# EAGLE board PCB (EAGLE 9.7.0)
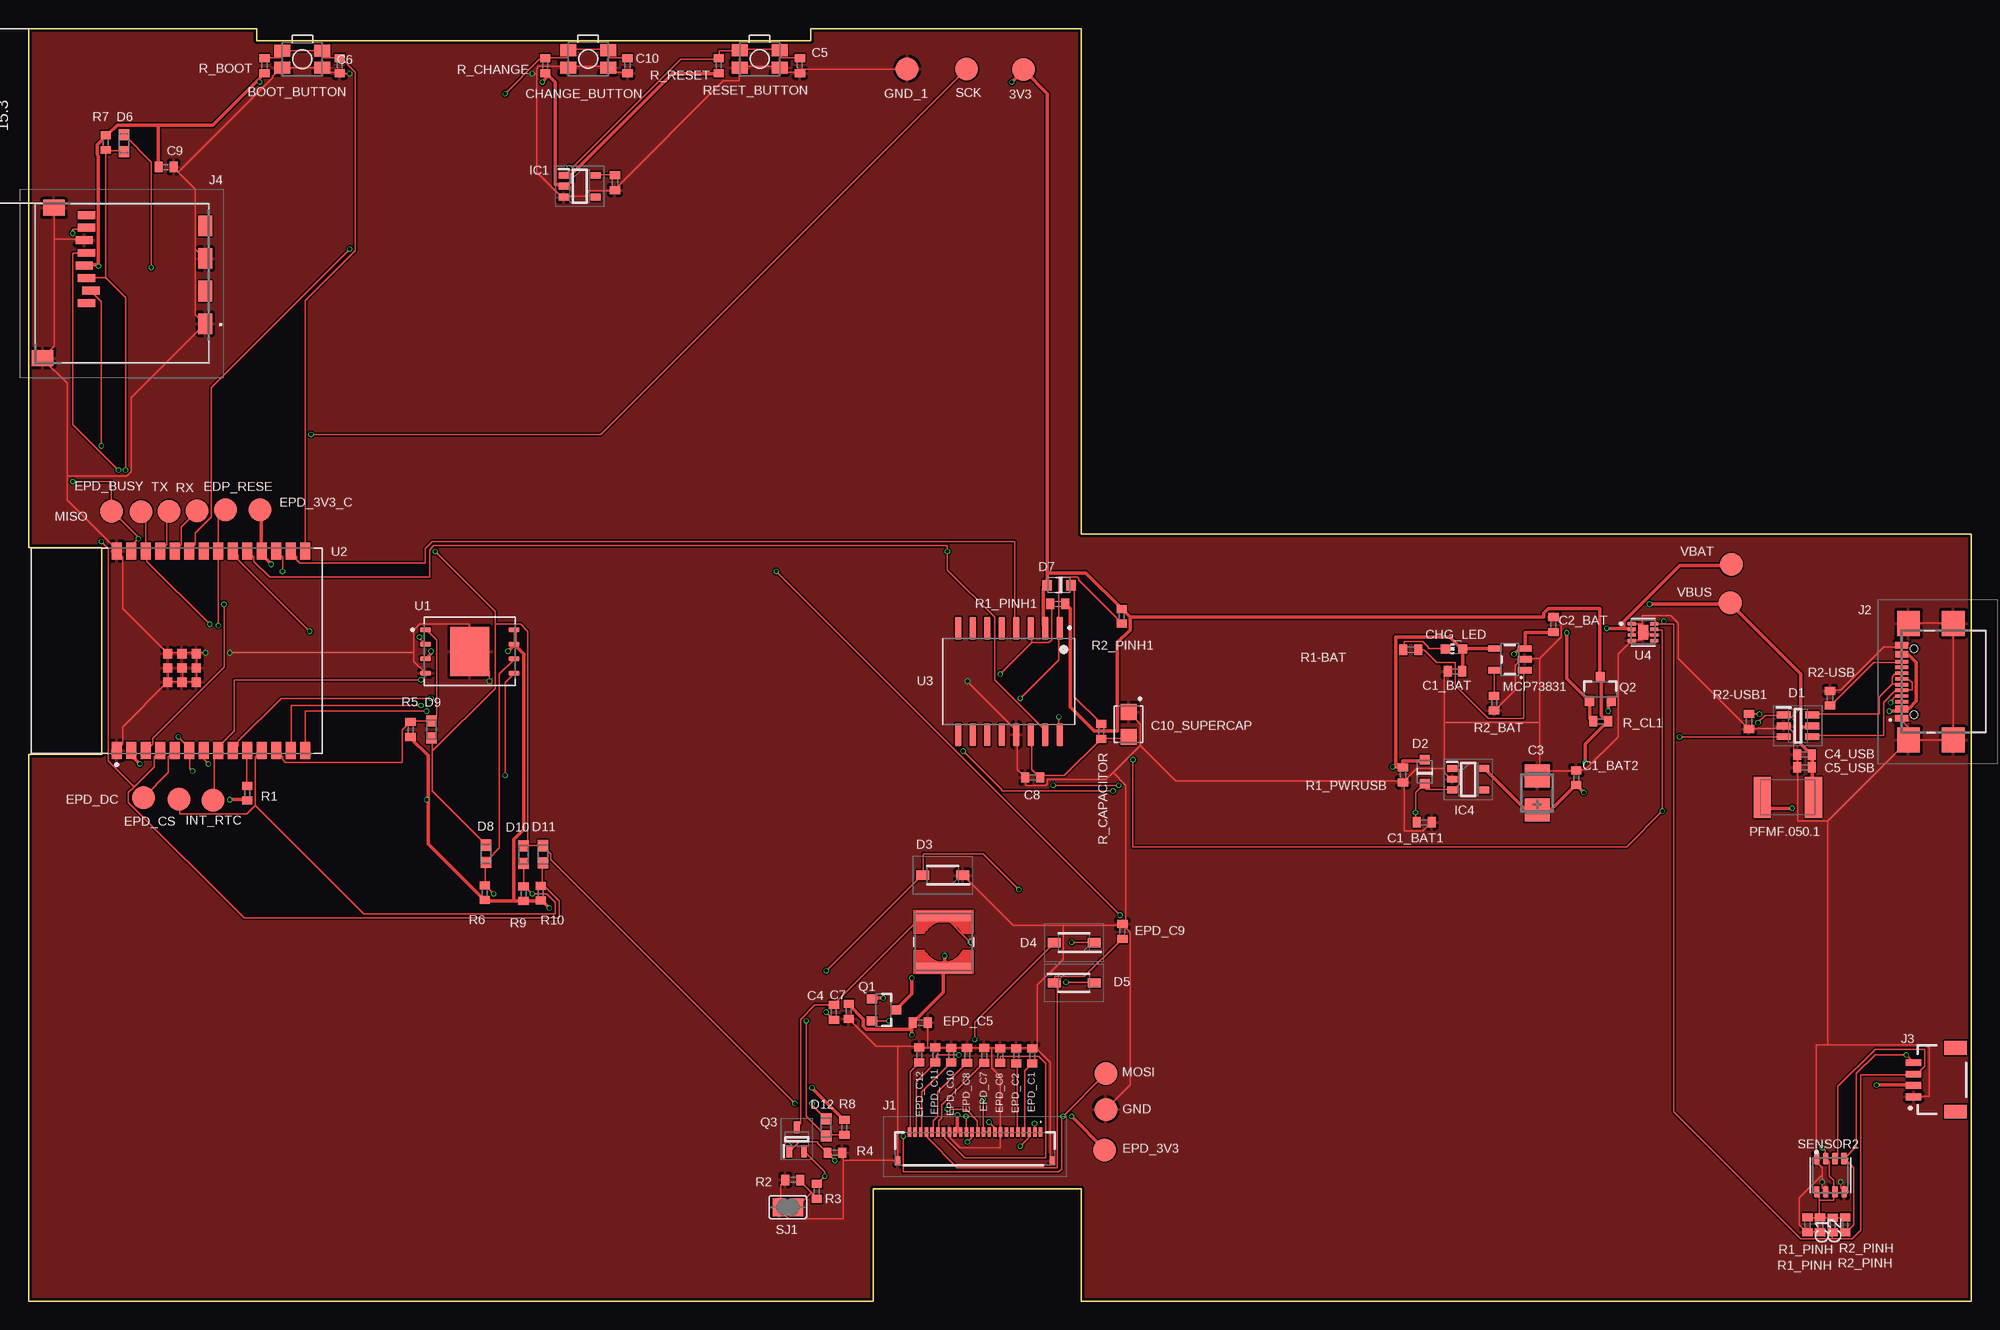
[diagram p0: board, top side]
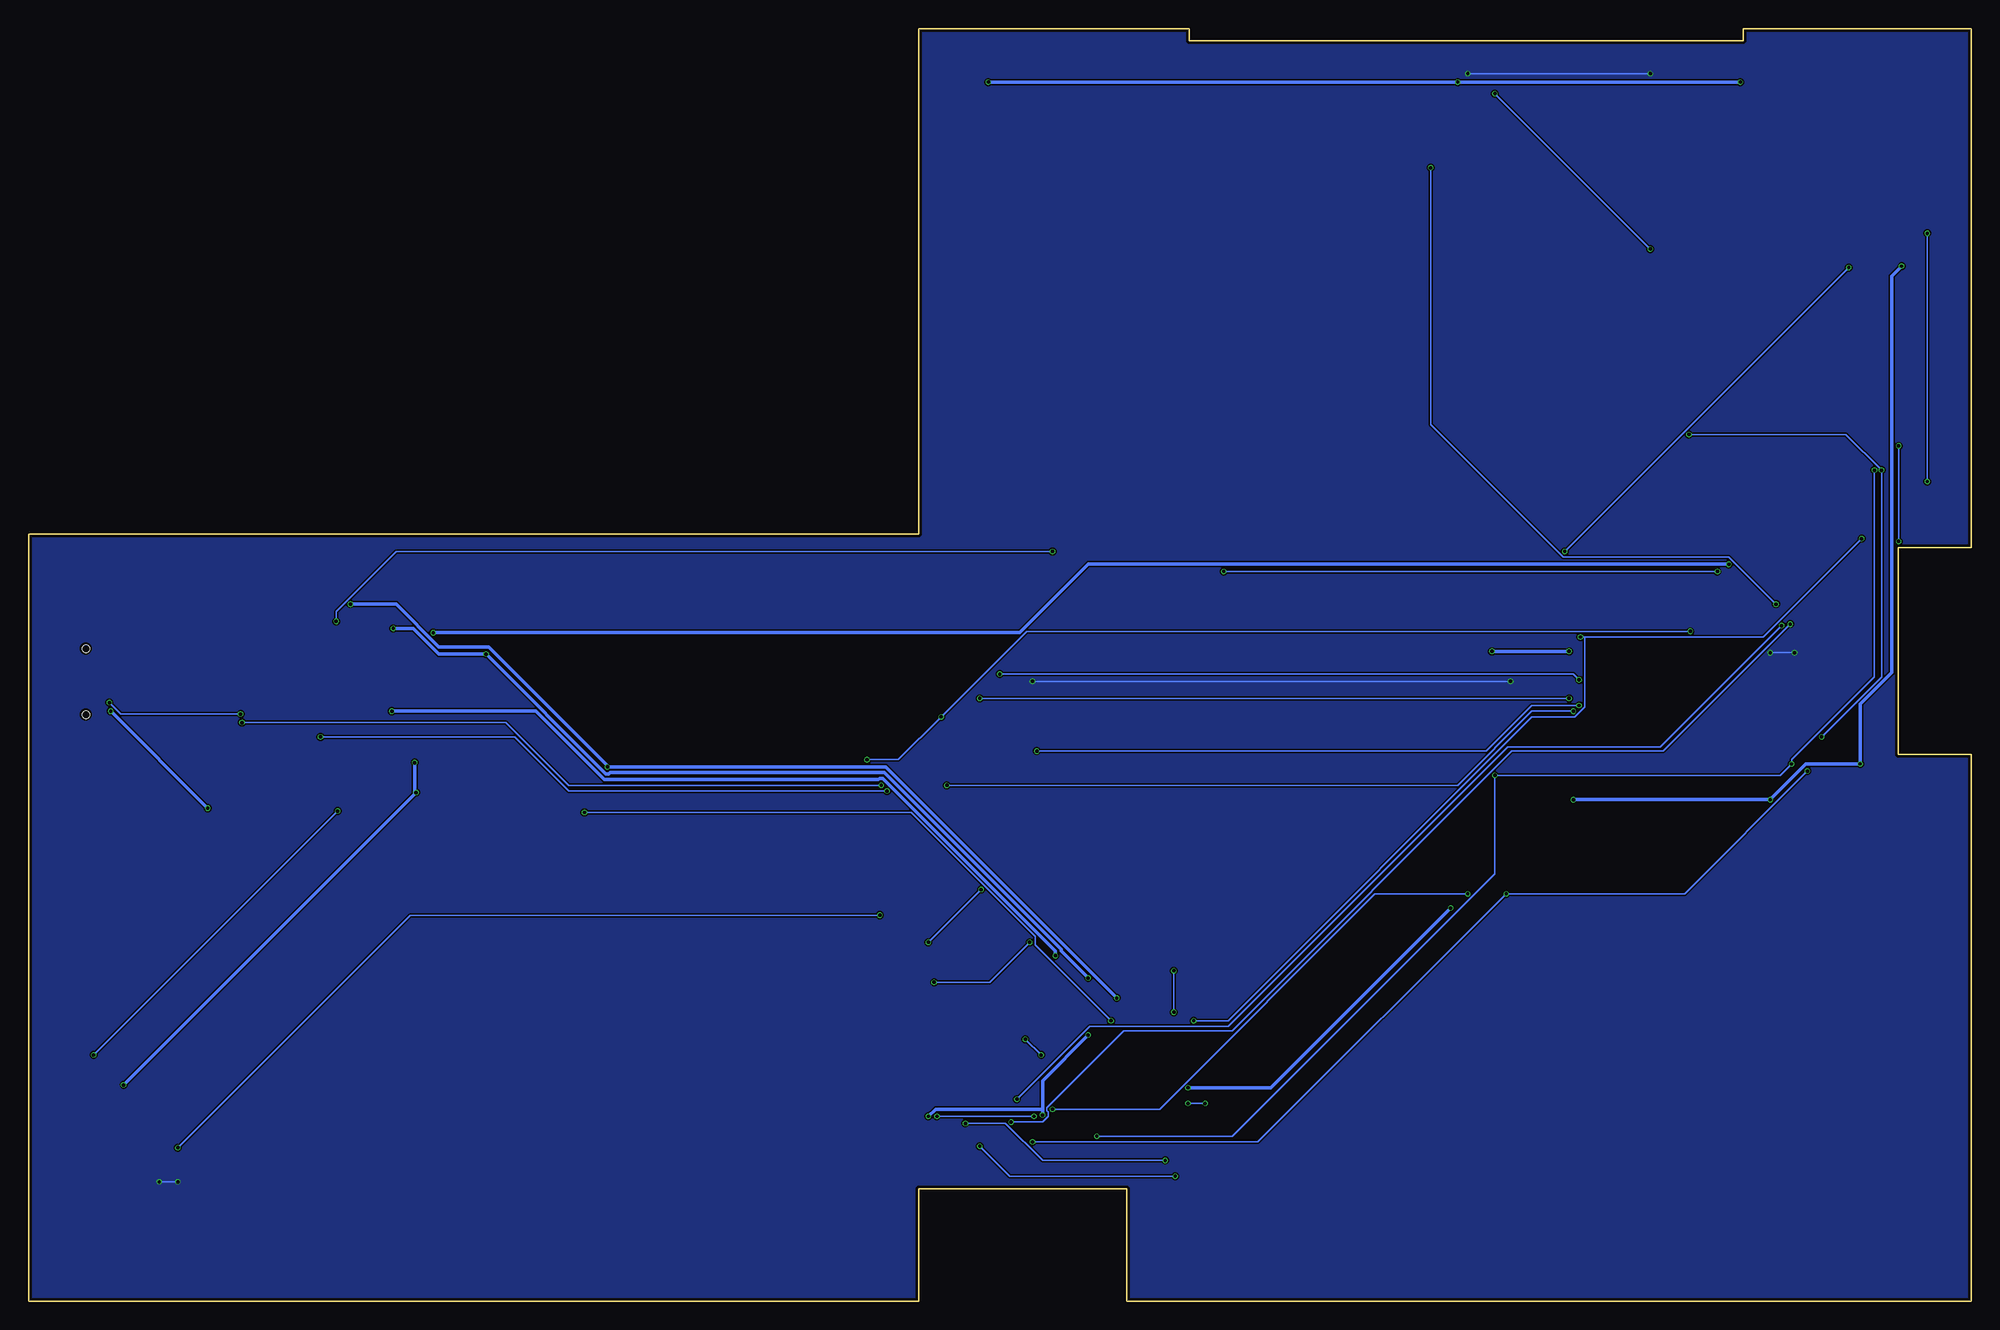
[diagram p1: board, bottom side, seen from below]

Size 170.2 x 111.52 mm. Coordinates in mm from the lower left corner, seen from the top.
Outline: 20,110.46 68.5,110.46 68.5,111.52 92.2,111.52 92.2,67.2 170.2,67.2 170.2,0 92.2,0 92.2,9.82 74,9.82 74,0 0,0 0,47.92 6.4,47.92 6.4,66.02 0,66.02 0,111.52 20,111.52 20,110.46
Copper layers (1*16): Top 0.035mm / dielectric 1.6mm / Bottom 0.035mm
Design rules "jlcpcb-2layers.dru *": minimum track width 0.15mm, minimum drill 0.3mm, track to track 5mil, track to pad 5mil, pad to pad 5mil, via to via 5mil, smd to smd 5mil, copper to edge 0.2mm, drill to drill 6mil, minimum pad ring 10mil, minimum via ring 3mil, stop-mask expansion 4mil, vias tented up to drill 0mil, thermal gap 10mil
Net classes: 1 power: width 0.3 mm

## Footprints (pad centres in the part's own frame; a part is rotated, then mirrored left to right if it is on the bottom)
TP20R = smd 2 x 2: TP 0,0
MYBUTTON = smd 1.4 x 1.05: 1 1.75,0.75; 2 -1.75,0.75; 3 -1.75,-0.75; 4 1.75,-0.75
ESP32_WROVER_EAGLE-LTSPICE_C0402 = smd 0.7 x 0.9: 1 -0.65,0; 2 0.65,0
RCL_CT3528 = smd 2 x 2.2: + -1.5,0; - 1.5,0
CAPCP3225X100N = smd 1.4 x 1.4: 1 -1.1,0; 2 1.1,0
ADAFRUIT_CHIP-LED0603 = smd 0.8 x 0.8: A 0,-0.75; C 0,0.75
SOT95P280X145-6N = smd 1.2 x 0.6: 1 -1.25,0.95; 2 -1.25,0; 3 -1.25,-0.95; 4 1.25,-0.95; 5 1.25,0; 6 1.25,0.95
ESP32_WROVER_AVX---SD0805S020S1R0_AVX_SD0805S020S1R0_0 = smd 0.8 x 0.9: 1 -1.05,0; 2 1.05,0
SOD3716X135N = smd 1.15 x 0.8: 1 -1.75,0; 2 1.75,0
DIOC1608X36N = smd 0.97 x 0.94: 1 -0.75,0; 2 0.75,0
SOT95P280X120-5N = smd 0.9 x 0.6: 1 -1.4,0.95; 2 -1.4,0; 3 -1.4,-0.95; 4 1.4,-0.95; 5 1.4,0.95
FH34SRJ24S05SH99 = smd 0.3 x 0.8: 1 5.75,1.45; 2 5.25,1.45; 3 4.75,1.45; 4 4.25,1.45; 5 3.75,1.45; 6 3.25,1.45; 7 2.75,1.45; 8 2.25,1.45; 9 1.75,1.45; 10 1.25,1.45; 11 0.75,1.45; 12 0.25,1.45; 13 -0.25,1.45; 14 -0.75,1.45; 15 -1.25,1.45; 16 -1.75,1.45; 17 -2.25,1.45; 18 -2.75,1.45; 19 -3.25,1.45; 20 -3.75,1.45; 21 -4.25,1.45; 22 -4.75,1.45; 23 -5.25,1.45; 24 -5.75,1.45 | smd 0.4 x 0.8: MP1 6.75,-1.05; MP2 -6.75,-1.05
SAMACSYS_PARTS_USB4110GFA = smd 0.3 x 1.15: A1 -3.35,3.678; A4 -2.55,3.678; A5 -1.25,3.678; A6 -0.25,3.678; A7 0.25,3.678; A8 1.25,3.678; A9 2.55,3.678; A12 3.35,3.678; B1 3.05,3.678; B4 2.25,3.678; B5 1.75,3.678; B6 0.75,3.678; B7 -0.75,3.678; B8 -1.75,3.678; B9 -2.25,3.678; B12 -3.05,3.678 | smd 2.18 x 2: MP1 -5.11,-0.827; MP2 5.11,-0.827; MP3 -5.11,3.103; MP4 5.11,3.103 | hole 0.65: -2.89,2.603; 2.89,2.603
JST04_1MM_RA = smd 0.6 x 1.35: 1 -1.5,0; 2 -0.5,0; 3 0.5,0; 4 1.5,0 | smd 1.2 x 2: NC1 2.8,-3.675; NC2 -2.8,-3.675
112ATAARR03ATTEND = smd 1.8 x 1.2: G1 10.6,10.4; G2 4.9,10.4; S1 7.75,10.4; S2 2.05,10.4 | smd 1.4 x 1.9: G3 13.6,-3.85; G4 0.45,-2.85 | smd 0.7 x 1.5: P1 8.8,0; P2 7.7,0.4; P3 6.6,0; P4 5.5,-0.2; P5 4.4,0; P6 3.3,-0.2; P7 2.2,0; P8 1.1,0
IND_4828-WE-TPC_WRE = smd 0.889 x 4.826: 1 -2.286,0; 2 2.286,0
ESP32_WROVER_SPARKFUN-IC-POWER_SOT23-5 = smd 0.55 x 1.2: 1 -0.95,-1.3; 2 0,-1.3; 3 0.95,-1.3; 4 0.95,1.3; 5 -0.95,1.3
ESP32C6_VARISTOR_CT/CN1812 = smd 1.5 x 3.6: 1 -2.25,0; 2 2.25,0
ESP32_WROVER_SPARKFUN-DISCRETESEMI_SOT23-3 = smd 0.8 x 0.9: 1 -0.95,-1; 2 0.95,-1; 3 0,1.1
SOT65P210X110-3N = smd 1.05 x 0.5: 1 -1.05,0.65; 2 -1.05,-0.65; 3 1.05,0
ESP32_WROVER_EAGLE-LTSPICE_R0402 = smd 0.7 x 0.9: 1 -0.65,0; 2 0.65,0
ESP32_WROVER_BME680_PSON80P300X300X100-8N = smd 1.016 x 0.5: 1 1.458,1.2; 2 1.458,0.4; 3 1.458,-0.4; 4 1.458,-1.2; 5 -1.458,-1.22; 6 -1.458,-0.4; 7 -1.458,0.4; 8 -1.458,1.2
SJ = smd 1.168 x 1.6: 1 -0.762,0; 2 0.762,0
SON127P600X800X80-9N = smd 0.94 x 0.44: 1 -3.895,1.905; 2 -3.895,0.635; 3 -3.895,-0.635; 4 -3.895,-1.905; 5 3.895,-1.905; 6 3.895,-0.635; 7 3.895,0.635; 8 3.895,1.905 | smd 3.4 x 4.3: 9 0,0
XCVR_ESP32-C6-WROOM-1-N8 = smd 1.5 x 0.9: 1 -8.75,5.26; 2 -8.75,3.99; 3 -8.75,2.72; 4 -8.75,1.45; 5 -8.75,0.18; 6 -8.75,-1.09; 7 -8.75,-2.36; 8 -8.75,-3.63; 9 -8.75,-4.9; 10 -8.75,-6.17; 11 -8.75,-7.44; 12 -8.75,-8.71; 13 -8.75,-9.98; 14 -8.75,-11.25; 15 8.75,-11.25; 16 8.75,-9.98; 17 8.75,-8.71; 18 8.75,-7.44; 19 8.75,-6.17; 20 8.75,-4.9; 21 8.75,-3.63; 22 8.75,-2.36; 23 8.75,-1.09; 24 8.75,0.18; 25 8.75,1.45; 26 8.75,2.72; 27 8.75,3.99; 28 8.75,5.26 | smd 0.8 x 0.8: 29_1 -2.755,0.79; 29_2 -1.505,0.79; 29_3 -0.255,0.79; 29_4 -2.755,-0.46; 29_5 -1.505,-0.46; 29_6 -0.255,-0.46; 29_7 -2.755,-1.71; 29_8 -1.505,-1.71; 29_9 -0.255,-1.71
SOIC127P1032X265-16N = smd 2.05 x 0.59: 1 -4.655,4.445; 2 -4.655,3.175; 3 -4.655,1.905; 4 -4.655,0.635; 5 -4.655,-0.635; 6 -4.655,-1.905; 7 -4.655,-3.175; 8 -4.655,-4.445; 9 4.655,-4.445; 10 4.655,-3.175; 11 4.655,-1.905; 12 4.655,-0.635; 13 4.655,0.635; 14 4.655,1.905; 15 4.655,3.175; 16 4.655,4.445
SON50P200X200X80-9N = smd 0.76 x 0.27: 1 -0.985,0.75; 2 -0.985,0.25; 3 -0.985,-0.25; 4 -0.985,-0.75; 5 0.985,-0.75; 6 0.985,-0.25; 7 0.985,0.25; 8 0.985,0.75 | smd 0.9 x 1.3: 9 0,0

## Placement (x,y rotation side)
3V3  TPTP20R  [TP20R]  87.17,107.92 0 top
BOOT_BUTTON  BUTTON_CUSYOMV1  [MYBUTTON]  23.99,108.82 180 top
C1  100nF  [ESP32_WROVER_EAGLE-LTSPICE_C0402]  155.84,6.68 270 top
C1_BAT  4.7uF  [ESP32_WROVER_EAGLE-LTSPICE_C0402]  124.96,55.19 180 top
C1_BAT1  4.7uF  [ESP32_WROVER_EAGLE-LTSPICE_C0402]  122.27,41.96 0 top
C1_BAT2  4.7uF  [ESP32_WROVER_EAGLE-LTSPICE_C0402]  135.57,45.87 90 top
C2  100nF  [ESP32_WROVER_EAGLE-LTSPICE_C0402]  156.94,6.69 270 top
C2_BAT  4.7UF  [ESP32_WROVER_EAGLE-LTSPICE_C0402]  133.58,59.3 90 top
C3  100uF  [RCL_CT3528]  132.15,44.53 90 top
C4  4.7uF/25V  [ESP32_WROVER_EAGLE-LTSPICE_C0402]  70.55,25.31 90 top
C4_USB  100nF  [ESP32_WROVER_EAGLE-LTSPICE_C0402]  155.57,47.89 180 top
C5  1uF  [ESP32_WROVER_EAGLE-LTSPICE_C0402]  67.57,108.27 270 top
C5_USB  4.7uF  [ESP32_WROVER_EAGLE-LTSPICE_C0402]  155.57,46.78 180 top
C6  100nF  [ESP32_WROVER_EAGLE-LTSPICE_C0402]  27.27,108.27 270 top
C7  10uF  [ESP32_WROVER_EAGLE-LTSPICE_C0402]  71.85,25.4 270 top
C8  100nF  [ESP32_WROVER_EAGLE-LTSPICE_C0402]  87.97,45.89 180 top
C9  100nF  [ESP32_WROVER_EAGLE-LTSPICE_C0402]  12.05,99.38 0 top
C10  100nF  [ESP32_WROVER_EAGLE-LTSPICE_C0402]  52.47,108.27 270 top
C10_SUPERCAP  CPH3225A  [CAPCP3225X100N]  96.37,50.54 270 top
C_DELAY  100nF  [ESP32_WROVER_EAGLE-LTSPICE_C0402]  51.37,98.02 270 top
CHANGE_BUTTON  BUTTON_CUSYOMV1  [MYBUTTON]  49.02,108.85 180 top
CHG_LED  [ADAFRUIT_CHIP-LED0603]  124.88,57.16 90 top
D1  USBLC6-2SC6Y  [SOT95P280X145-6N]  155,50.41 0 top
D2  ESP32_WROVER_AVX---SD0805S020S1R0_AVX_SD0805S020S1R0_0_0AVX_SD0805S020S1R0_0_0  [ESP32_WROVER_AVX---SD0805S020S1R0_AVX_SD0805S020S1R0_0]  122.31,46.39 90 top
D3  MBR0530  [SOD3716X135N]  80.09,37.32 180 top
D4  MBR0530  [SOD3716X135N]  91.59,31.41 180 top
D5  MBR0530  [SOD3716X135N]  91.59,27.89 0 top
D6  PGB1010603MR  [DIOC1608X36N]  8.37,101.48 90 top
D7  ESP32_WROVER_AVX---SD0805S020S1R0_AVX_SD0805S020S1R0_0_0AVX_SD0805S020S1R0_0_0  [ESP32_WROVER_AVX---SD0805S020S1R0_AVX_SD0805S020S1R0_0]  90.27,62.74 180 top
D8  PGB1010603MR  [DIOC1608X36N]  40.07,39.2 90 top
D9  PGB1010603MR  [DIOC1608X36N]  35.31,50.09 270 top
D10  PGB1010603MR  [DIOC1608X36N]  43.37,39.12 90 top
D11  PGB1010603MR  [DIOC1608X36N]  45.07,39.16 90 top
D12  PGB1010603MR  [DIOC1608X36N]  69.87,15.23 90 top
EDP_RESE  TPTP20R  [TP20R]  17.27,69.34 0 top
EPD_3V3  TPTP20R  [TP20R]  94.27,13.24 0 top
EPD_3V3_C  TPTP20R  [TP20R]  20.27,69.36 0 top
EPD_BUSY  TPTP20R  [TP20R]  9.87,69.18 0 top
EPD_C1  1uF/50V  [ESP32_WROVER_EAGLE-LTSPICE_C0402]  87.92,21.49 90 top
EPD_C2  1uF/50V  [ESP32_WROVER_EAGLE-LTSPICE_C0402]  86.52,21.5 90 top
EPD_C5  1uF/50V  [ESP32_WROVER_EAGLE-LTSPICE_C0402]  78.12,24.41 0 top
EPD_C6  1uF/50V  [ESP32_WROVER_EAGLE-LTSPICE_C0402]  85.12,21.52 90 top
EPD_C7  1uF/50V  [ESP32_WROVER_EAGLE-LTSPICE_C0402]  83.72,21.53 90 top
EPD_C8  1uF/50V  [ESP32_WROVER_EAGLE-LTSPICE_C0402]  82.22,21.54 90 top
EPD_C9  1uF/50V  [ESP32_WROVER_EAGLE-LTSPICE_C0402]  95.82,32.41 90 top
EPD_C10  1uF/50V  [ESP32_WROVER_EAGLE-LTSPICE_C0402]  80.82,21.56 90 top
EPD_C11  1uF/50V  [ESP32_WROVER_EAGLE-LTSPICE_C0402]  79.42,21.57 90 top
EPD_C12  1uF/50V  [ESP32_WROVER_EAGLE-LTSPICE_C0402]  78.02,21.58 90 top
EPD_CS  TPTP20R  [TP20R]  13.17,44 0 top
EPD_DC  TPTP20R  [TP20R]  10.07,44.12 0 top
GND  TPTP20R  [TP20R]  94.37,16.8 0 top
GND_1  TPTP20R  [TP20R]  76.97,107.98 0 top
IC1  BD5229G-TR  [SOT95P280X120-5N]  48.28,97.7 0 top
IC4  XC6220A331MR-G  [SOT95P280X120-5N]  126.12,45.73 0 top
INT_RTC  TPTP20R  [TP20R]  16.17,43.9 0 top
J1  FH34SRJ-24S-0.5SH_99_  [FH34SRJ24S05SH99]  82.91,13.36 0 top
J2  SAMACSYS_PARTS_USB4110-GF-A  [SAMACSYS_PARTS_USB4110GFA]  167.78,54.28 90 top
J3  QWIIC_RIGHT_ANGLE  [JST04_1MM_RA]  165.13,19.4 90 top
J4  112A-TAAR-R03_ATTEND  [112ATAARR03ATTEND]  5.08,96.26 270 top
L1  68uH  [IND_4828-WE-TPC_WRE]  80.16,31.48 270 top
MCP73831  ESP32_WROVER_SPARKFUN-IC-POWER_MCP73831  [ESP32_WROVER_SPARKFUN-IC-POWER_SOT23-5]  129.76,56.24 90 top
MISO  TPTP20R  [TP20R]  7.27,69.22 0 top
MOSI  TPTP20R  [TP20R]  94.37,19.94 0 top
PFMF.050.1  ESP32C6_VARISTORCN1812  [ESP32C6_VARISTOR_CT/CN1812]  154.11,44.15 0 top
Q1  20V/4.2A/52mΩ/1.4W  [ESP32_WROVER_SPARKFUN-DISCRETESEMI_SOT23-3]  74.88,25.52 270 top
Q2  20V/4.2A/52mΩ/1.4W  [ESP32_WROVER_SPARKFUN-DISCRETESEMI_SOT23-3]  137.69,53.6 0 top
Q3  SI1308EDL-T1-GE3  [SOT65P210X110-3N]  67.29,14.19 90 top
R1  10k  [ESP32_WROVER_EAGLE-LTSPICE_R0402]  19.16,44.51 270 top
R1-BAT  200  [ESP32_WROVER_EAGLE-LTSPICE_R0402]  121.08,57.08 0 top
R1_PINH  10K  [ESP32_WROVER_EAGLE-LTSPICE_R0402]  158.04,6.67 90 top
R1_PINH1  10K  [ESP32_WROVER_EAGLE-LTSPICE_R0402]  90.17,61.1 0 top
R1_PWRUSB  100K  [ESP32_WROVER_EAGLE-LTSPICE_R0402]  120.4,46.12 90 top
R2  2.2  [ESP32_WROVER_EAGLE-LTSPICE_R0402]  66.95,10.62 0 top
R2-USB  5K1  [ESP32_WROVER_EAGLE-LTSPICE_R0402]  157.81,52.83 90 top
R2-USB1  5K1  [ESP32_WROVER_EAGLE-LTSPICE_R0402]  150.71,50.79 90 top
R2_BAT  2K  [ESP32_WROVER_EAGLE-LTSPICE_R0402]  128.38,52.39 90 top
R2_PINH  10K  [ESP32_WROVER_EAGLE-LTSPICE_R0402]  159.14,6.68 90 top
R2_PINH1  10K  [ESP32_WROVER_EAGLE-LTSPICE_R0402]  95.77,60.01 90 top
R3  0.47  [ESP32_WROVER_EAGLE-LTSPICE_R0402]  69.04,9.61 90 top
R4  10k  [ESP32_WROVER_EAGLE-LTSPICE_R0402]  70.64,13 180.1 top
R5  10K  [ESP32_WROVER_EAGLE-LTSPICE_R0402]  33.47,50.08 270 top
R6  10K  [ESP32_WROVER_EAGLE-LTSPICE_R0402]  39.97,35.79 270 top
R7  10K  [ESP32_WROVER_EAGLE-LTSPICE_R0402]  6.77,101.53 90 top
R8  10K  [ESP32_WROVER_EAGLE-LTSPICE_R0402]  71.47,15.22 90 top
R9  10K  [ESP32_WROVER_EAGLE-LTSPICE_R0402]  43.37,35.71 270 top
R10  10K  [ESP32_WROVER_EAGLE-LTSPICE_R0402]  44.87,35.75 270 top
R_BOOT  10K  [ESP32_WROVER_EAGLE-LTSPICE_R0402]  20.67,108.27 90 top
R_CAPACITOR  15  [ESP32_WROVER_EAGLE-LTSPICE_R0402]  93.97,49.93 270 top
R_CHANGE  10K  [ESP32_WROVER_EAGLE-LTSPICE_R0402]  45.27,108.27 90 top
R_CL1  10K  [ESP32_WROVER_EAGLE-LTSPICE_R0402]  137.72,50.81 180 top
R_RESET  10K  [ESP32_WROVER_EAGLE-LTSPICE_R0402]  60.47,108.27 90 top
RESET_BUTTON  BUTTON_CUSYOMV1  [MYBUTTON]  64.04,108.85 180 top
RX  TPTP20R  [TP20R]  14.77,69.24 0 top
SCK  TPTP20R  [TP20R]  82.17,107.96 0 top
SENSOR2  ESP32_WROVER_BME680_BME680  [ESP32_WROVER_BME680_PSON80P300X300X100-8N]  157.84,11.03 90 top
SJ1  [SJ]  66.52,8.23 0 top
TX  TPTP20R  [TP20R]  12.32,69.22 0 top
U1  W25Q512JVEIQ  [SON127P600X800X80-9N]  38.65,56.93 0 top
U2  ESP32-C6-WROOM-1-N8  [XCVR_ESP32-C6-WROOM-1-N8]  12.98,56.99 90 top
U3  DS3231SN#  [SOIC127P1032X265-16N]  85.88,54.3 270 top
U4  MAX17048G+T10  [SON50P200X200X80-9N]  141.44,58.62 0 top
VBAT  TPTP20R  [TP20R]  149.17,64.56 0 top
VBUS  TPTP20R  [TP20R]  149.07,61.18 0 top

## Library data of the parts
3V3 BOOT_BUTTON CHANGE_BUTTON CHG_LED EDP_RESE EPD_3V3 EPD_3V3_C EPD_BUSY EPD_CS EPD_DC GND GND_1 INT_RTC MISO MOSI PFMF.050.1 RESET_BUTTON RX SCK SJ1 TX VBAT VBUS = DeskAssistant v19 v1
C1 C1_BAT C1_BAT1 C1_BAT2 C2 C2_BAT C4 C4_USB C5 C5_USB C6-C10 C_DELAY EPD_C1 EPD_C2 EPD_C5-EPD_C12 = DeskAssistant v19 v1; SPICEMODEL: NONE; SPICEPREFIX: C
C3 = DeskAssistant v19 v1; SPICEPREFIX: C
C10_SUPERCAP = DeskAssistant v19 v1; AVAILABILITY: Not in stock; CHECK_PRICES: https://www.snapeda.com/parts/CPH3225A/Seiko+Instruments/view-part/?ref=eda; DESCRIPTION: 11 mF (EDLC) Supercapacitor 3.3 V 1210 (3225 Metric) - -; MF: Seiko Instruments; MP: CPH3225A; PACKAGE: 1210 Seiko; PRICE: None; PURCHASE-URL: https://www.snapeda.com/api/url_track_click_mouser/?unipart_id=562593&manufacturer=Seiko Instruments&part_name=CPH3225A&search_term=None; SNAPEDA_LINK: https://www.snapeda.com/parts/CPH3225A/Seiko+Instruments/view-part/?ref=snap
D1 = DeskAssistant v19 v1; AVAILABILITY: In Stock; CHECK_PRICES: https://www.snapeda.com/parts/USBLC6-2SC6Y/STMicroelectronics/view-part/?ref=eda; DESCRIPTION: 17V Clamp 5A (8/20µs) Ipp Tvs Diode Surface Mount SOT-23-6; MF: STMicroelectronics; MP: USBLC6-2SC6Y; PACKAGE: SOT-23-6 STMicroelectronics; PRICE: None; SNAPEDA_LINK: https://www.snapeda.com/parts/USBLC6-2SC6Y/STMicroelectronics/view-part/?ref=snap
D2 D7 = DeskAssistant v19 v1; CENTROID_NOT_SPECIFIED: No; DATASHEET: http://datasheets.avx.com/schottky.pdf; DIGIKEY_DESCRIPTION: DIODE SCHOTTKY 20V 1A 0805; DIGIKEY_PART_NUMBER: 478-7800-1-ND; LEAD_FREE: yes; MF: AVX; MOUSER_PART_NUMBER: 581-SD0805S020S1R0; PACKAGE: 0805 (2012 metric); PREFIX: D; ROHS: yes; TEMPERATURE_RANGE_HIGH: +125°C; TEMPERATURE_RANGE_LOW: -55°C
D3-D5 = DeskAssistant v19 v1; AVAILABILITY: In Stock; CHECK_PRICES: https://www.snapeda.com/parts/MBR0530/Onsemi/view-part/?ref=eda; DESCRIPTION: Diode Schottky 30 V 500mA Surface Mount SOD-123; MF: ON Semiconductor; MP: MBR0530; PACKAGE: SOD-123-2 ON Semiconductor; PRICE: None; PURCHASE-URL: https://www.snapeda.com/api/url_track_click_mouser/?unipart_id=179458&manufacturer=ON Semiconductor&part_name=MBR0530&search_term=None; SNAPEDA_LINK: https://www.snapeda.com/parts/MBR0530/Onsemi/view-part/?ref=snap
D6 D8-D12 = DeskAssistant v19 v1; AVAILABILITY: In Stock; CHECK_PRICES: https://www.snapeda.com/parts/PGB1010603MR/Littelfuse/view-part/?ref=eda; DESCRIPTION: 150V (Typ) Clamp - Ipp Tvs Diode Surface Mount 0603 (1608 Metric); MF: Littelfuse Inc.; MP: PGB1010603MR; PACKAGE: 0603 Littelfuse Inc.; PRICE: None; PURCHASE-URL: https://www.snapeda.com/api/url_track_click_mouser/?unipart_id=5659453&manufacturer=Littelfuse Inc.&part_name=PGB1010603MR&search_term=None; SNAPEDA_LINK: https://www.snapeda.com/parts/PGB1010603MR/Littelfuse/view-part/?ref=snap
IC1 = DeskAssistant v19 v1; DESCRIPTION: Voltage Detector with Adjustable Delay Time: CMOS processes are utilized to develop high precision, low current consumption CMOS reset ICs that allow arbitrary setting of the delay time. The extensive lineup includes both Nch Open Drain and CMOS output types in a wide range of detection voltages (from 2.3V to 6.0V, in 0.1V steps), enabling selection of the ideal solution based on customer requirements. In addition, the entire series is of course both lead-free and RoHS-compliant.; HEIGHT: 1.25mm; MANUFACTURER_NAME: ROHM Semiconductor; MANUFACTURER_PART_NUMBER: BD5229G-TR; MOUSER_PART_NUMBER: 755-BD5229G-TR; MOUSER_PRICE-STOCK: https://www.mouser.co.uk/ProductDetail/ROHM-Semiconductor/BD5229G-TR?qs=4kLU8WoGk0vvnhrrYwdszw%3D%3D
IC4 = DeskAssistant v19 v1; DESCRIPTION: LDO Voltage Regulators; HEIGHT: 1.2mm; MANUFACTURER_NAME: Torex; MANUFACTURER_PART_NUMBER: XC6220A331MR-G; MOUSER_PART_NUMBER: 865-XC6220A331MR-G; MOUSER_PRICE-STOCK: https://www.mouser.co.uk/ProductDetail/Torex-Semiconductor/XC6220A331MR-G?qs=AsjdqWjXhJ8ZSWznL1J0gg%3D%3D
J1 = DeskAssistant v19 v1; DESCRIPTION: 24 Position FFC, FPC Connector Contacts, Top and Bottom 0.020" (0.50mm) Surface Mount, Right Angle; HEIGHT: 1.1mm; MANUFACTURER_NAME: Hirose; MANUFACTURER_PART_NUMBER: FH34SRJ-24S-0.5SH(99); MOUSER_PART_NUMBER: 798-FH34SRJ24S05SH99; MOUSER_PRICE-STOCK: https://www.mouser.co.uk/ProductDetail/Hirose-Connector/FH34SRJ-24S-0.5SH99?qs=vcbW%252B4%252BSTIpKBl5ap9J8Fw%3D%3D
J2 = DeskAssistant v19 v1; DESCRIPTION: CONN USB 2.0 TYPE-C R/A SMT; HEIGHT: 3.26mm; MANUFACTURER_NAME: GCT (GLOBAL CONNECTOR TECHNOLOGY); MANUFACTURER_PART_NUMBER: USB4110-GF-A; MOUSER_PART_NUMBER: 640-USB4110-GF-A; MOUSER_PRICE-STOCK: https://www.mouser.co.uk/ProductDetail/GCT/USB4110-GF-A?qs=KUoIvG%2F9IlYiZvIXQjyJeA%3D%3D
J3 = DeskAssistant v19 v1; PROD_ID: CONN-13694
J4 = DeskAssistant v19 v1; DESCRIPTION: Micro SD Card Socket, Push-Push Type, Top Mount, SMT, H=1.83mm, 10u; HEIGHT: 1.9mm; MANUFACTURER_NAME: ATTEND; MANUFACTURER_PART_NUMBER: 112A-TAAR-R03 ATTEND
L1 = DeskAssistant v19 v1; COPYRIGHT: Copyright (C) 2024 Ultra Librarian. All rights reserved.; MANUFACTURER_PART_NUMBER: 744043680; MFR_NAME: Wurth Electronics
MCP73831 = DeskAssistant v19 v1; PROD_ID: IC-09995
Q1 Q2 = DeskAssistant v19 v1; PROD_ID: TRAN-14388
Q3 = DeskAssistant v19 v1; AVAILABILITY: In Stock; CHECK_PRICES: https://www.snapeda.com/parts/SI1308EDL-T1-GE3/Vishay+Siliconix/view-part/?ref=eda; DESCRIPTION: Si1308EDL-T1-GE3 N-channel MOSFET Transistor, 1.5 A, 30 V, 3-Pin SC-70 | Siliconix / Vishay SI1308EDL-T1-GE3; MF: Vishay Siliconix; MP: SI1308EDL-T1-GE3; PACKAGE: SOT-323 Vishay Semiconductor; PRICE: None; PURCHASE-URL: https://www.snapeda.com/api/url_track_click_mouser/?unipart_id=274603&manufacturer=Vishay Siliconix&part_name=SI1308EDL-T1-GE3&search_term=None; SNAPEDA_LINK: https://www.snapeda.com/parts/SI1308EDL-T1-GE3/Vishay+Siliconix/view-part/?ref=snap
R1 R1-BAT R1_PINH R1_PINH1 R1_PWRUSB R2 R2-USB R2-USB1 R2_BAT R2_PINH R2_PINH1 R3-R10 R_BOOT R_CAPACITOR R_CHANGE R_CL1 R_RESET = DeskAssistant v19 v1; SPICEMODEL: NONE; SPICEPREFIX: R
SENSOR2 = DeskAssistant v19 v1; AVAILABILITY: Unavailable; DESCRIPTION: Integrated Environmental Unit; MF: Bosch Sensortec; MP: BME680; PACKAGE: LGA-8 Bosch Tools; PRICE: None
U1 = DeskAssistant v19 v1; AVAILABILITY: In Stock; CHECK_PRICES: https://www.snapeda.com/parts/W25Q512JVEIQ/Winbond+Electronics/view-part/?ref=eda; DESCRIPTION: FLASH - NOR Memory IC 512Mb (64M x 8) SPI - Quad I/O 133 MHz 8-WSON (8x6); MF: Winbond Electronics; MP: W25Q512JVEIQ; PACKAGE: Package; PRICE: None; SNAPEDA_LINK: https://www.snapeda.com/parts/W25Q512JVEIQ/Winbond+Electronics/view-part/?ref=snap
U2 = DeskAssistant v19 v1; AVAILABILITY: In Stock; CHECK_PRICES: https://www.snapeda.com/parts/ESP32-C6-WROOM-1-N8/Espressif+Systems/view-part/?ref=eda; DESCRIPTION: Multiprotocol Modules ESP32-C6 module, Wi-Fi 6 in 2.4 GHz band, Bluetooth 5, Zigbee 3.0 and Thread. ESP34-WROOM Compatible - ENGINEERING SAMPLE; MF: Espressif Systems; MP: ESP32-C6-WROOM-1-N8; PACKAGE: None; PRICE: None; SNAPEDA_LINK: https://www.snapeda.com/parts/ESP32-C6-WROOM-1-N8/Espressif+Systems/view-part/?ref=snap
U3 = DeskAssistant v19 v1; AVAILABILITY: In Stock; CHECK_PRICES: https://www.snapeda.com/parts/DS3231SN%23/Analog+Devices/view-part/?ref=eda; DESCRIPTION: Extremely Accurate I²C-Integrated RTC/TCXO/Crystal; MF: Analog Devices; MP: DS3231SN#; PACKAGE: SOIC-16 Maxim; PRICE: None; PURCHASE-URL: https://www.snapeda.com/api/url_track_click_mouser/?unipart_id=99048&manufacturer=Analog Devices&part_name=DS3231SN#&search_term=None; SNAPEDA_LINK: https://www.snapeda.com/parts/DS3231SN%23/Analog+Devices/view-part/?ref=snap
U4 = DeskAssistant v19 v1; AVAILABILITY: In Stock; CHECK_PRICES: https://www.snapeda.com/parts/MAX17048G+T10/Analog+Devices/view-part/?ref=eda; DESCRIPTION: 3µA 1-Cell/2-Cell Fuel Gauge with ModelGauge; MF: Analog Devices; MP: MAX17048G+T10; PACKAGE: TDFN-8 Maxim; PRICE: None; PURCHASE-URL: https://www.snapeda.com/api/url_track_click_mouser/?unipart_id=329239&manufacturer=Analog Devices&part_name=MAX17048G+T10&search_term=None; SNAPEDA_LINK: https://www.snapeda.com/parts/MAX17048G+T10/Analog+Devices/view-part/?ref=snap

## Nets
3V3 [power]: 3V3.TP C1_BAT2.1 C3.+ C9.1 D7.2 IC1.2 IC4.5 J3.2 J4.P4 Q2.3 R1.2 R1_PINH1.2 R2_PINH1.2 R5.2 R6.2 R7.2 R8.2 R9.2 R10.2 R_BOOT.1 R_CHANGE.1 R_CL1.1 R_RESET.1 U1.3 U1.7 U1.8 U2.2 U3.2
32KHZ: R2_PINH1.1 U2.9 U3.1
DN: D1.4 J2.A7 J2.B7
DP: D1.6 J2.A6 J2.B6
EPD_3V3 [power]: C7.1 EPD_3V3.TP EPD_C5.1 J1.15 J1.16 L1.2 Q2.2
EPD_3V3_C [power]: EPD_3V3_C.TP Q2.1 R_CL1.2 U2.18
EPD_BUSY: EPD_BUSY.TP J1.9 U2.26
EPD_CS: D10.1 EPD_CS.TP J1.12 R9.1 U2.11
EPD_DC: EPD_DC.TP U2.5
EPD_RST: EDP_RESE.TP J1.10 J1.11 U2.21
FLASH_CS: D9.1 R5.1 U1.1 U2.12
GDR: J1.2 Q3.1 R4.2
GND: BOOT_BUTTON.1 BOOT_BUTTON.2 C1.2 C1_BAT1.2 C1_BAT2.2 C1_BAT.2 C2.2 C2_BAT.2 C3.- C4_USB.2 C5.2 C5_USB.2 C6.2 C7.2 C8.2 C9.2 C10.2 C10_SUPERCAP.1 C_DELAY.2 CHANGE_BUTTON.1 CHANGE_BUTTON.2 D1.2 D3.1 EPD_C1.2 EPD_C2.2 EPD_C5.2 EPD_C6.2 EPD_C7.2 EPD_C8.2 EPD_C9.2 EPD_C10.2 EPD_C11.2 EPD_C12.2 GND.TP GND_1.TP IC1.3 IC4.2 J1.8 J1.17 J1.MP1 J1.MP2 J2.A1 J2.A12 J2.B1 J2.B12 J2.MP1 J2.MP2 J2.MP3 J2.MP4 J3.1 J4.G1 J4.G2 J4.G3 J4.G4 J4.P6 MCP73831.2 R1_PWRUSB.1 R2-USB1.1 R2-USB.2 R2.1 R2_BAT.1 R4.1 RESET_BUTTON.1 RESET_BUTTON.2 SENSOR2.1 SENSOR2.5 SENSOR2.7 SJ1.1 U1.4 U1.9 U2.1 U2.28 U2.29_1 U2.29_2 U2.29_3 U2.29_4 U2.29_5 U2.29_6 U2.29_7 U2.29_8 U2.29_9 U3.13 U4.1 U4.4 U4.6 U4.9
GPIO8: R1.1 U2.10
I2C_PW: C1.1 C2.1 R1_PINH.2 R2_PINH.2 SENSOR2.2 SENSOR2.6 SENSOR2.8 U2.17
INT_RTC: INT_RTC.TP R1_PINH1.1 U2.8 U3.3
IO/BOOT: BOOT_BUTTON.3 BOOT_BUTTON.4 C6.1 R_BOOT.2 U2.15
IO/CHANGE: C10.1 CHANGE_BUTTON.3 CHANGE_BUTTON.4 R_CHANGE.2 U2.23
MISO: D12.1 J4.P7 MISO.TP R8.1 U1.2 U2.27
MOSI: D6.1 J1.14 J4.P3 MOSI.TP R7.1 U1.5 U2.7
N$3: C1_BAT1.1 D2.1 IC4.1 IC4.3 Q1.2
N$4: C4.1 D3.2 D4.1
N$5: J2.B5 R2-USB.1
N$6: J2.A5 R2-USB1.2
N$9: CHG_LED.C R1-BAT.1
N$10: MCP73831.1 R1-BAT.2
N$11: EPD_C12.1 J1.24
N$12: MCP73831.5 R2_BAT.2
N$13: C_DELAY.1 IC1.5
N$14: D7.1 R_CAPACITOR.1
N$15: EPD_C10.1 J1.22
N$17: EPD_C8.1 J1.20
N$18: EPD_C7.1 J1.19
N$19: EPD_C6.1 J1.18
N$21: EPD_C2.1 J1.5
N$22: EPD_C1.1 J1.4
N$23: D6.2 D8.2 D9.2 D10.2 D11.2 D12.2
PREVGH: D5.1 EPD_C9.1 J1.21
PREVGL: D4.2 EPD_C11.1 J1.23
RESE: J1.3 Q3.2 R3.2
RESE': R2.2 R3.1 SJ1.2
RESET: C5.1 IC1.1 R_RESET.2 RESET_BUTTON.3 RESET_BUTTON.4 U2.3
RTC_RST: U2.16 U3.4
RX: RX.TP U2.24
SCK: D8.1 J1.13 J4.P5 R6.1 SCK.TP U1.6 U2.6
SCL: J3.4 R2_PINH.1 SENSOR2.4 U2.20 U3.16 U4.7
SDA: J3.3 R1_PINH.1 SENSOR2.3 U2.19 U3.15 U4.8
SRC: C4.2 D5.2 L1.1 Q3.3
SS_SD: D11.1 J4.P2 R10.1 U2.4
TX: TX.TP U2.25
USB_D+: D1.1 U2.14
USB_D-: D1.3 U2.13
VBAT: C2_BAT.1 MCP73831.3 Q1.3 U4.2 U4.3 VBAT.TP
VBUS [power]: C1_BAT.1 C4_USB.1 C5_USB.1 CHG_LED.A D1.5 D2.2 MCP73831.4 PFMF.050.1.2 Q1.1 R1_PWRUSB.2 VBUS.TP
VRTC: C8.1 C10_SUPERCAP.2 R_CAPACITOR.2 U3.14
VUSB [power]: J2.A4 J2.A9 J2.B4 J2.B9 PFMF.050.1.1

## Tracks (layer width: path | path; a pad name or v marks a point on that pad's centre or on a via)
3V3  (via drill 0.3)
  Top 0.3: v17.62,43.95 19.12,43.95 R1.2 | v9.75,47.07 9,47.82 9,48.2 U2.2 | v35.25,56.95 35.25,56.7 34.88,56.32 U1.3 | v42,56.95 42.5,57.45 U1.7 | U1.8 42.62,58.82 42.62,57.7 U1.7 | 42.5,35.07 43.25,35.07 R9.2 44.75,35.07 R10.2 45,35.07 v45.62,34.45 | 42.5,35.07 40,35.07 R6.2 39.88,35.2 35,40.07 35,43.95 | v68.62,18.7 71.38,15.95 R8.2 | 35,43.95 35,47.82 33.5,49.32 R5.2 | 42.5,35.07 42.5,40.45 43.38,41.32 43.38,56.7 42.62,57.45 U1.7 | v34.88,43.95 35,43.95 | R_RESET.1 60.38,107.57 56.38,107.57 47.62,98.82 47.62,98.19 47.25,97.82 47,97.82 IC1.2 46.88,97.82 46.12,97.82 46.12,106.82 45.38,107.57 R_CHANGE.1 45.5,107.32 v45,106.82 | 11.38,103.07 7.75,103.07 6.88,102.19 R7.2 6.75,102.07 6,101.32 6,100.44 6.12,100.32 6.12,90.82 | 11.38,103.07 11.38,99.44 C9.1 | 20.06,107.01 16.12,103.07 11.38,103.07 | 20.06,107.01 20.62,107.57 R_BOOT.1 | 6.12,90.82 5,90.82 J4.P4 | 20.06,107.01 v20.25,106.82 | U3.2 89,59.07 88.88,59.2 88.88,62.45 89.12,62.7 D7.2 89.25,62.82 89.25,63.82 | 89.25,63.82 92.62,63.82 95.75,60.7 R2_PINH1.2 95.88,60.57 96.5,59.95 | 96.5,59.95 96.5,58.82 95.38,57.7 95.38,49.95 93.38,49.95 91.25,52.07 91.25,60.7 90.88,61.07 R1_PINH1.2 | 89.25,63.82 89.25,105.82 87.25,107.82 3V3.TP 87.12,107.82 v86.12,106.82 | IC4.5 127.62,46.57 131.12,43.07 132.12,43.07 C3.+ 132.25,43.07 133.38,43.07 135.5,45.2 C1_BAT2.1 135.62,45.2 v136.25,44.57 | v161.88,18.95 165.12,18.95 J3.2 | v136.38,47.2 136.38,48.82 138.25,50.7 R_CL1.1 138.25,50.82 137.75,51.32 137.75,54.7 Q2.3 137.62,54.82 137.62,60.7 133.12,60.7 132.75,60.32 132.75,59.95 96.5,59.95 | v6.12,90.69 6.12,90.82
  Bottom 0.3: v42,56.95 v35.25,56.95 | v68.62,18.7 61.38,18.7 v45.62,34.45 | v34.88,43.95 v17.62,43.95 14.5,47.07 v9.75,47.07 9.75,52.32 7,55.07 7,89.82 v6.12,90.69 | v20.25,106.82 v45,106.82 v86.12,106.82 | v161.88,18.95 v136.25,44.57 136.38,44.57 v136.38,47.2
32KHZ  (via drill 0.3)
  Top 0.15: R2_PINH1.1 95.75,59.45 92,63.2 92,63.32 91.88,63.45 90.25,63.45 90.25,59.07 U3.1 90.25,58.95 90.25,56.2 v86.88,52.82 | v35.25,52.82 22.12,52.82 18.38,49.07 18.38,48.7 18,48.32 U2.9
  Bottom 0.15: v86.88,52.82 v35.25,52.82
DN
  Top 0.15: J2.A7 164.12,54.45 164.75,54.45 165,54.2 165,53.57 164.12,53.57 J2.B7 164,53.45 163.5,53.45 162.5,52.45 162.5,49.57 156.25,49.57 D1.4
DP
  Top 0.15: 163.25,54.07 164,54.07 J2.A6 | 163.25,54.07 163.25,54.7 163.5,54.95 164,54.95 J2.B6 | 163.25,54.07 162.12,52.95 162.12,51.45 156.25,51.45 D1.6
EPD_3V3  (via drill 0.3)
  Top 0.3: 81.38,14.82 81.62,14.82 J1.15 | 81.38,14.82 81.25,14.82 J1.16 | 77.38,23.82 73.38,23.82 73.12,24.07 73.12,24.7 71.88,25.95 C7.1 | 77.38,23.82 77.38,24.32 EPD_C5.1 77.5,24.45 80.12,27.07 80.12,29.07 L1.2 80.25,29.2 v80.25,30.27 | v81.38,16.32 81.38,14.82 | 77.38,23.82 v77.38,23.32 | v91.38,16.2 94.25,13.32 EPD_3V3.TP | v138.38,51.7 138.38,52.32 138.62,52.57 Q2.2
  Bottom 0.3: 81.38,16.82 81.38,19.32 v77.38,23.32 | 81.38,16.82 v81.38,16.32 | v91.38,16.2 90.75,16.82 81.38,16.82 | v138.38,51.7 125.75,51.7 119.75,45.7 95.75,45.7 95.62,45.82 95.38,45.82 80.25,30.7 v80.25,30.27
EPD_3V3_C  (via drill 0.3)
  Top 0.3: R_CL1.2 137,50.82 136.75,51.07 136.75,52.57 Q2.1 136.62,52.7 134.75,54.57 v134.75,58.57 | EPD_3V3_C.TP 20.38,69.32 20.38,65.82 U2.18 20.5,65.69 20.5,65.32 v21.25,64.57
  Bottom 0.3: v134.75,58.57 83.38,58.57 77.38,64.57 v21.25,64.57
EPD_BUSY  (via drill 0.3)
  Top 0.15: v84.12,15.7 84.62,15.2 84.62,14.82 J1.9 | v15.88,59.32 10.38,64.82 10.38,65.69 U2.26 10.25,65.82 10.25,68.69 9.88,69.07 EPD_BUSY.TP
  Bottom 0.15: v84.12,15.7 81.38,15.7 80.88,16.2 80.88,16.57 81,16.7 81,16.95 74.25,23.7 64.75,23.7 40.25,48.2 27,48.2 v15.88,59.32
EPD_CS  (via drill 0.3)
  Top 0.15: U2.11 19.88,47.7 19.88,43.45 | 19.88,43.45 19.12,42.7 13.25,42.7 13.25,43.95 EPD_CS.TP | v80.5,16.82 82.12,16.82 83.12,15.82 83.12,14.82 J1.12 | 43.38,36.45 v44.12,35.7 45.38,35.7 46.12,34.95 46.12,33.95 29.38,33.95 19.88,43.45 | 43.38,36.45 43.38,38.32 D10.1 | 43.38,36.45 R9.1
  Bottom 0.15: v80.5,16.82 71.12,16.82 52.25,35.7 v44.12,35.7
EPD_DC
  Top 0.15: U2.5 12.75,48.2 12.25,47.7 12.25,46.32 10.12,44.2 EPD_DC.TP
EPD_RST  (via drill 0.3)
  Top 0.15: J1.10 84.12,14.82 83.75,14.82 J1.11 83.62,14.82 v83.62,17.7 | v16.62,59.2 16.62,65.69 U2.21 16.62,65.82 16.62,68.69 EDP_RESE.TP
  Bottom 0.15: v83.62,17.7 77.25,24.07 65.12,24.07 40.62,48.57 27.25,48.57 v16.62,59.2
FLASH_CS
  Top 0.15: U1.1 34.88,58.82 35.75,57.95 35.75,51.32 35.38,50.95 D9.1 35.25,50.82 33.5,50.82 R5.1 33.38,50.7 32.75,50.07 32.75,47.2 22.5,47.2 22.25,47.45 22.25,47.7 21.75,48.2 U2.12
GDR  (via drill 0.3)
  Top 0.15: v88.12,15.57 88.12,14.82 J1.2 | v70.62,12.32 70,12.95 R4.2 69.88,13.07 69.12,13.82 69.12,13.95 67.5,13.95 66.75,13.2 Q3.1
  Bottom 0.15: v88.12,15.57 84.62,15.57 81.38,12.32 v70.62,12.32
GND  (via drill 0.3)
  Top 0.15: C10.2 52.38,107.69 50.88,107.69 50.88,108.07 CHANGE_BUTTON.2 50.75,108.19 47.38,108.19 CHANGE_BUTTON.1 47.25,108.19 44.62,108.19 44.62,108.07 44.5,107.94 44.5,107.57 | GND_1.TP 76.88,107.94 67.62,107.94 67.62,107.69 C5.2 67.5,107.69 65.88,107.69 65.88,108.07 RESET_BUTTON.2 65.75,108.19 62.38,108.19 RESET_BUTTON.1 62.25,108.07 62.25,106.94 60.88,106.94 51.38,97.44 C_DELAY.2 51.25,97.32 49.12,97.32 49,97.19 49,96.82 47,96.82 IC1.3 46.88,96.82 46.62,96.82 44.5,98.94 44.5,107.57 | 13.12,98.94 14.62,97.44 14.62,92.19 | 13.12,98.94 12.75,99.32 C9.2 | 14.62,92.19 15.38,91.44 J4.G2 | 14.62,92.19 14.62,86.44 15.38,85.69 J4.G1 15.38,85.57 9,79.19 9,72.69 8.62,72.32 3.38,72.32 | 13.12,98.94 21.38,107.19 21.38,107.32 22.12,108.07 BOOT_BUTTON.1 25.62,108.07 BOOT_BUTTON.2 25.75,107.69 27.25,107.69 C6.2 27.38,107.57 v28.12,107.57 | 2.25,93.07 4.88,93.07 J4.P6 | 2.25,93.07 2.25,95.69 J4.G4 | 2.25,93.07 2.25,83.69 1.25,82.69 J4.G3 1.25,82.57 3.38,80.44 3.38,72.32 | 12.25,54.32 12.25,55.45 U2.29_2 | 13.5,54.32 13.5,55.45 U2.29_5 | 12.25,54.32 13.38,54.32 U2.29_4 13.5,54.32 | 12.25,54.32 U2.29_1 12.12,54.2 8.25,50.32 8.25,48.82 7.75,48.32 U2.1 | 13.5,54.32 14.62,54.32 U2.29_7 14.75,54.32 14.75,55.45 U2.29_8 14.75,55.57 14.75,56.7 U2.29_9 | 33.75,56.82 33.75,58.82 34.25,59.32 38.62,59.32 38.62,56.95 U1.9 38.75,56.82 40.38,55.2 v40.38,54.32 | 33.75,56.82 33.75,56.07 34.75,55.07 U1.4 | U2.29_9 14.62,56.82 13.5,56.82 U2.29_6 13.38,56.82 12.25,56.82 U2.29_3 12.12,56.82 8.25,60.7 8.25,65.19 7.75,65.69 U2.28 7.62,65.82 7.62,65.94 3.38,70.19 3.38,72.32 | v17.62,56.82 33.75,56.82
  Top 0.15: v15.5,56.82 14.75,56.82 U2.29_9 | v44.12,107.57 44.5,107.57 | R2.1 65.88,10.2 65.88,8.32 SJ1.1 65.88,8.2 66.38,7.7 66.38,7.45 66.62,7.2 71.38,7.2 71.38,12.32 | 71.38,12.32 76.12,12.32 | 71.38,12.32 71.38,12.95 R4.1 | J1.17 80.75,14.7 80.75,14.32 81.62,13.45 85.12,13.45 85.12,14.7 J1.8 85.12,14.82 85.12,19.7 84.38,20.45 84.38,22.2 | 84.38,22.2 85,22.2 EPD_C6.2 85.12,22.2 86.5,22.2 EPD_C2.2 86.62,22.2 87.88,22.2 EPD_C1.2 88,22.07 88.38,22.07 | 84.38,22.2 83.75,22.2 EPD_C7.2 83.62,22.2 82.25,22.2 EPD_C8.2 82.12,22.2 80.88,22.2 EPD_C10.2 80.75,22.2 79.5,22.2 EPD_C11.2 79.38,22.2 78.75,22.2 | 78.75,22.2 78.12,22.2 EPD_C12.2 78,22.32 76.12,22.32 | 78.75,22.2 78.75,24.32 EPD_C5.2 | 76.12,22.32 74.25,22.32 71.88,24.7 C7.2 | 76.12,22.32 76.12,12.32 | 76.12,12.32 J1.MP2 | 97.38,48.7 97.38,50.57 96.38,51.57 C10_SUPERCAP.1 | 95,46.32 94.38,45.7 89.25,45.7 89.25,45.32 89.12,45.2 87.38,45.2 87.38,45.82 C8.2 87.25,45.95 86.62,46.57 86.62,49.57 U3.13 86.5,49.7 86.5,50.07 v82.25,54.32 | 95,46.32 97.38,48.7 | 88.38,22.07 89.5,20.95 89.5,12.45 89.62,12.32 J1.MP1 | 90.62,32.95 95.75,32.95 EPD_C9.2 95.88,32.95 96.12,32.7 | 90.62,32.95 90.62,29.95 88.38,27.7 88.38,22.07 | 90.62,32.95 86.25,32.95 81.88,37.32 D3.1 | 96.12,32.7 96.5,32.32 96.5,18.95 94.38,16.82 GND.TP | 95,46.32 96.12,45.2 96.12,32.7 | C2.2 156.88,6.07 155.88,6.07 C1.2 155.75,6.07 155.12,6.7 155.12,9.07 157.12,11.07 | 157.12,11.07 157.12,11.7 156.75,12.07 156.75,12.45 SENSOR2.1 156.62,12.57 156.62,22.45 157.62,22.45 | 157.12,11.07 v157.12,10.45 157.12,9.95 157.38,9.7 SENSOR2.7 | v158.75,10.45 158.75,9.95 159,9.7 SENSOR2.5
  Top 0.15: 157.62,22.45 166.25,22.45 166.5,22.2 166.5,17.95 165.25,17.95 J3.1 | J2.B12 164.12,51.2 164.12,50.95 J2.A1 164.12,50.82 164.62,50.32 164.62,49.2 J2.MP3 | J2.MP3 164.75,49.2 168.5,49.2 J2.MP1 168.62,49.2 168.62,59.32 J2.MP2 168.5,59.45 164.75,59.45 J2.MP4 164.62,59.32 164.12,58.82 164.12,57.7 J2.A12 164.12,57.57 164.12,57.45 J2.B1 164,57.32 162.5,57.32 158.75,53.57 157.88,53.57 R2-USB.2 | R1_PWRUSB.1 121.62,46.7 124,46.7 | 124,46.7 124,46.32 124.62,45.7 IC4.2 | C1_BAT1.2 122.88,41.95 122.12,41.2 120.5,41.2 120.5,45.45 R1_PWRUSB.1 | 124,46.7 124,50.7 | 124,50.7 124,54.82 124.25,55.07 C1_BAT.2 | R2_BAT.1 128.5,51.82 130.25,53.57 130.25,55.7 130.75,56.2 131,56.2 MCP73831.2 131.12,56.32 132.38,56.32 | 132.38,56.32 134.25,58.2 134.25,59.32 133.62,59.95 C2_BAT.2 | 153.75,50.2 150.75,50.2 R2-USB1.1 150.62,50.2 144.5,56.32 144.5,59.45 143.88,60.07 141.38,60.07 141.38,59.32 | 153.75,50.2 D1.2 153.75,50.32 | 153.75,50.2 154.25,50.2 154.62,49.82 154.62,48.2 154.88,47.95 C4_USB.2 155,47.82 155,46.82 C5_USB.2 155,46.7 155,42.07 157.62,42.07 | 141.38,58.45 141.38,58.57 U4.9 | 141.38,58.45 141.38,57.95 140.5,57.95 U4.4 140.38,57.82 139.25,56.7 139.25,49.45 136.38,46.57 135.62,46.57 C1_BAT2.2 135.5,46.45 132.38,46.45 | 141.38,59.32 140.5,59.32 U4.1 | 141.38,59.32 141.38,58.7 U4.9 | 141.38,58.45 142.38,58.45 U4.6 | 141.38,58.45 U4.9 | 132.38,46.45 132.25,46.45 132.25,46.07 C3.- 132.38,46.45 | 132.38,46.45 132.38,50.7 | 132.38,50.7 132.38,56.32 | 132.38,50.7 124,50.7 | 157.62,42.07 164.62,49.07 J2.MP3 | 157.62,42.07 157.62,22.45 | 97.38,48.7 100.5,45.57 120.38,45.57 R1_PWRUSB.1
  Bottom 0.15: v15.5,56.82 v17.62,56.82 | v28.12,107.57 v44.12,107.57 | v157.12,10.45 v158.75,10.45 | v82.25,54.32 v40.38,54.32
  pour Bottom: 73.96,9.88 73.98,9.9 92.22,9.9 92.24,9.88 92.26,9.86 92.28,9.84 92.28,0.1 170.12,0.1 170.12,67.14 92.18,67.14 92.16,67.16 92.14,67.18 92.12,67.2 92.12,111.44 68.58,111.44 68.58,110.4 68.56,110.38 68.54,110.36 68.52,110.34 19.98,110.34 19.96,110.36 19.94,110.38 19.92,110.4 19.92,111.44 0.08,111.44 0.08,66.1 6.42,66.1 6.44,66.08 6.46,66.06 6.48,66.04 6.48,47.9 6.46,47.88 6.44,47.86 6.42,47.84 0.08,47.84 0.08,0.1 73.92,0.1 73.92,9.84 73.94,9.86
  pour Top: 73.96,9.88 73.98,9.9 92.22,9.9 92.24,9.88 92.26,9.86 92.28,9.84 92.28,0.1 170.12,0.1 170.12,67.14 92.18,67.14 92.16,67.16 92.14,67.18 92.12,67.2 92.12,111.44 68.58,111.44 68.58,110.4 68.56,110.38 68.54,110.36 68.52,110.34 19.98,110.34 19.96,110.36 19.94,110.38 19.92,110.4 19.92,111.44 0.08,111.44 0.08,66.1 6.42,66.1 6.44,66.08 6.46,66.06 6.48,66.04 6.48,47.9 6.46,47.88 6.44,47.86 6.42,47.84 0.08,47.84 0.08,0.1 73.92,0.1 73.92,9.84 73.94,9.86
GPIO8
  Top 0.15: R1.1 19.12,45.2 19.12,48.2 U2.10
I2C_PW  (via drill 0.3)
  Top 0.15: C1.1 155.88,7.32 156.88,7.32 C2.1 | C2.1 157,7.32 R1_PINH.2 159.12,7.32 R2_PINH.2 | 156.88,8.82 156.88,7.45 C2.1 | 156.88,8.82 156.88,9.45 156.75,9.57 SENSOR2.8 | v22.25,63.95 22.25,65.19 21.75,65.69 U2.17 | v95.62,33.82 v65.5,63.95 | v157.12,13.45 157.38,13.2 157.38,12.57 SENSOR2.2 157.5,12.45 157.75,12.2 157.75,10.95 158.12,10.57 158.12,9.7 SENSOR2.6 158.12,9.57 158.12,8.82 156.88,8.82
  Bottom 0.15: v65.5,63.95 v22.25,63.95 | v95.62,33.82 136.75,33.82 v157.12,13.45
INT_RTC  (via drill 0.3)
  Top 0.15: 87.88,57.7 89.38,57.7 89.62,57.95 89.62,61.07 R1_PINH1.1 | 87.88,57.7 87.88,58.95 U3.3 | INT_RTC.TP 16.25,43.95 16.25,47.95 16.5,48.2 U2.8 16.62,48.32 16.62,48.57 18,49.95 18,54.45 v34.38,54.45 | v85.12,54.95 87.88,57.7
  Bottom 0.15: v85.12,54.95 34.88,54.95 v34.38,54.45
IO/BOOT
  Top 0.15: R_BOOT.2 20.75,108.94 22.12,108.94 22.12,109.57 BOOT_BUTTON.4 25.62,109.57 BOOT_BUTTON.3 25.75,108.94 27.25,108.94 C6.1 27.38,108.94 28.62,107.69 28.62,92.07 24.25,87.69 24.25,65.82 U2.15
IO/CHANGE  (via drill 0.3)
  Top 0.15: C10.1 52.38,108.94 50.88,108.94 50.88,109.57 CHANGE_BUTTON.3 50.75,109.69 47.38,109.69 CHANGE_BUTTON.4 47.25,109.57 47.25,108.94 45.38,108.94 R_CHANGE.2 45.25,108.82 44.75,108.82 v41.75,105.82 | v28.12,92.19 16,80.07 16,68.69 14.62,67.32 14.62,66.32 14.12,65.82 U2.23
  Bottom 0.15: v41.75,105.82 v28.12,92.19
MISO  (via drill 0.3)
  Top 0.15: v3.88,93.57 3.88,93.94 5,93.94 J4.P7 | v3.88,71.82 7.25,71.82 7.25,69.32 MISO.TP 7.38,69.19 9.62,66.94 v9.62,66.82 9,66.19 9,65.82 U2.27 | R8.1 69.88,14.57 D12.1 69.75,14.57 68.12,16.2 v68.12,24.57 | U1.2 34.25,58.07 v34.25,58.2
  Bottom 0.15: v3.88,71.82 v3.88,93.57 | 33.88,58.2 18.25,58.2 v9.62,66.82 | 33.88,58.2 v34.25,58.2 | v68.12,24.57 65.12,24.57 38.5,51.2 34.75,51.2 33.88,52.07 33.88,58.2
MOSI  (via drill 0.3)
  Top 0.15: v82.12,16.2 82.12,14.82 J1.14 | MOSI.TP v90.62,16.2 90.5,16.07 90.5,11.57 90.25,11.32 76.62,11.32 v76.62,14.45 | D6.1 8.25,100.82 6.88,100.82 R7.1 6.75,100.82 6.75,89.69 | 6.75,89.69 5.12,89.69 J4.P3 | v41.75,46.07 41.75,54.2 42.5,54.95 U1.5 | v15.75,47.07 15.38,47.45 15.38,48.2 U2.7 | 6.75,89.69 8.5,87.94 v8.5,72.82
  Bottom 0.15: v90.62,16.2 v82.12,16.2 | v8.5,72.82 8.5,54.7 15.75,47.45 v15.75,47.07 16.75,46.07 v41.75,46.07 41.75,37.45 64.75,14.45 v76.62,14.45
N$3  (via drill 0.3)
  Top 0.15: v75.38,24.57 Q1.2 | C1_BAT1.1 121.5,42.07 v121.5,42.82 121.5,44.57 122.25,45.32 D2.1 122.38,45.32 122.38,44.82 124.62,44.82 IC4.3 124.75,44.7 125.38,45.32 125.38,46.57 124.75,46.57 IC4.1
  Bottom 0.15: v75.38,24.57 82,31.2 82,31.95 92.88,42.82 v121.5,42.82
N$4  (via drill 0.3)
  Top 0.15: v69.88,25.32 70.5,24.7 C4.1 | v69.88,28.95 78.25,37.32 D3.2 78.38,37.45 78.38,39.2 83.62,39.2 v86.75,36.07 | v91.38,31.45 93.25,31.45 D4.1
  Bottom 0.15: v69.88,28.95 v69.88,25.32 | v86.75,36.07 v91.38,31.45
N$5
  Top 0.15: R2-USB.1 157.88,52.2 161.62,55.95 164,55.95 J2.B5
N$6  (via drill 0.3)
  Top 0.15: v151.62,51.45 150.75,51.45 R2-USB1.2 | v163.12,52.45 163.25,52.57 163.25,52.7 163.5,52.95 164,52.95 J2.A5
  Bottom 0.15: v151.62,51.45 162.12,51.45 v163.12,52.45
N$9
  Top 0.15: CHG_LED.C 124.12,57.2 122.62,57.2 122.62,57.32 122.12,57.82 120.5,57.82 120.5,57.2 R1-BAT.1
N$10
  Top 0.15: R1-BAT.2 121.75,57.07 122.25,57.07 123.38,55.95 125,55.95 125,53.95 127.88,51.07 131,51.07 131,55.2 MCP73831.1
N$11
  Top 0.15: J1.24 77.25,14.82 77.25,20.07 78,20.82 EPD_C12.1
N$12
  Top 0.15: R2_BAT.2 128.38,53.07 128.38,55.2 MCP73831.5
N$13
  Top 0.15: IC1.5 49.75,98.69 51.25,98.69 C_DELAY.1
N$14
  Top 0.15: R_CAPACITOR.1 93.88,50.7 91.62,52.95 91.62,62.45 91.38,62.7 D7.1
N$15
  Top 0.15: J1.22 78.25,14.82 78.25,18.32 80.75,20.82 EPD_C10.1
N$17
  Top 0.15: J1.20 79.25,14.82 79.25,15.82 79.62,16.2 79.62,18.32 82.12,20.82 EPD_C8.1
N$18
  Top 0.15: J1.19 79.75,14.82 79.75,15.82 80,16.07 80,17.2 83.62,20.82 EPD_C7.1
N$19
  Top 0.15: J1.18 80.25,14.7 80.25,14.32 82,12.57 89.12,12.57 89.12,20.82 88.5,21.45 85.12,21.45 85.12,20.95 EPD_C6.1
N$21
  Top 0.15: J1.5 86.62,14.82 86.62,20.82 EPD_C2.1
N$22
  Top 0.15: J1.4 87.25,14.82 87.25,20.2 87.88,20.82 EPD_C1.1
N$23  (via drill 0.3)
  Top 0.15: 43.75,39.95 45,39.95 D11.2 45.12,39.82 45.75,39.2 45.75,38.7 v67.12,17.32 | 43.75,39.95 43.38,39.95 D10.2 43.75,39.95 | v68.62,17.32 68.62,17.2 69.75,16.07 D12.2 | 35.38,48.2 35.38,49.32 D9.2 | 35.38,48.2 35.38,44.7 40,40.07 D8.2 | v10.75,90.57 10.75,99.82 8.38,102.19 D6.2 | v35.62,65.69 40.88,60.45 40.88,59.32 | 40.88,59.32 40.88,53.7 35.38,48.2 | 43.75,39.95 43.75,58.7 43.12,59.32 40.88,59.32
  Bottom 0.15: v67.12,17.32 v68.62,17.32 | v35.62,65.69 v10.75,90.57
PREVGH
  Top 0.15: J1.21 78.75,14.7 78.75,14.32 81.38,11.7 90.12,11.7 90.12,27.57 89.88,27.82 D5.1 89.88,27.95 89.88,28.45 92.5,28.45 95.75,31.7 EPD_C9.1
PREVGL  (via drill 0.3)
  Top 0.15: J1.23 77.75,14.82 77.75,19.2 79.38,20.82 EPD_C11.1 79.5,20.95 79.5,21.57 v81.5,21.57 | D4.2 82.88,24.45 v82.88,22.95
  Bottom 0.15: v81.5,21.57 v82.88,22.95
RESE  (via drill 0.3)
  Top 0.15: v86.88,13.57 87.62,14.32 87.62,14.7 J1.3 | R3.2 69.12,10.32 v69.75,10.95 69.75,11.32 68,13.07 Q3.2
  Bottom 0.15: v86.88,13.57 84.25,10.95 v69.75,10.95
RESE'
  Top 0.15: 68.5,9.57 67.62,10.45 67.62,10.57 R2.2 | 68.5,9.57 69,9.07 R3.1 | 68.5,9.57 68.5,9.45 67.38,8.32 SJ1.2
RESET  (via drill 0.3)
  Top 0.15: C5.1 67.5,108.94 65.88,108.94 65.88,109.57 RESET_BUTTON.3 65.75,109.69 62.38,109.69 RESET_BUTTON.4 62.25,109.57 60.5,109.57 60.5,108.94 R_RESET.2 60.38,108.82 57.12,108.82 47.5,99.19 | 47.5,99.19 47,98.69 IC1.1 | v17.12,61.07 17.12,55.57 10.88,49.32 10.88,48.82 10.38,48.32 U2.3 | 47.5,99.19 v47.38,99.32
  Bottom 0.15: v17.12,61.07 21.25,65.19 35.75,65.19 47.38,76.82 v47.38,99.32
RTC_RST
  Top 0.15: U2.16 23,65.69 23.5,65.19 23.5,64.94 23.75,64.69 34.75,64.69 34.75,65.94 35.38,66.57 86.38,66.57 86.38,59.2 86.5,59.07 U3.4
RX
  Top 0.15: U2.24 12.88,65.82 13.38,66.32 13.38,67.82 14.75,69.19 RX.TP
SCK  (via drill 0.3)
  Top 0.15: U1.6 42.5,56.2 41.25,54.95 41.25,39.7 40.12,38.57 D8.1 40,38.45 40,36.45 | v82.25,13.95 82.62,14.32 82.62,14.7 J1.13 | 40,36.45 v40.75,35.7 | 40,36.45 R6.1 | v7.88,72.82 3.88,76.82 3.88,91.82 5,91.82 J4.P5 | v13.12,49.45 14,48.57 14,48.32 U2.6 14.12,48.2 14.12,46.7 v14.38,46.45 | v24.75,75.94 50.12,75.94 82.12,107.94 SCK.TP
  Bottom 0.15: v82.25,13.95 62.5,13.95 v40.75,35.7 25.12,35.7 v14.38,46.45 | v13.12,49.45 7.88,54.7 v7.88,72.82 11,75.94 v24.75,75.94
SCL  (via drill 0.3)
  Top 0.15: R2_PINH.1 159.25,6.07 159.88,6.7 159.88,11.7 159.12,12.45 SENSOR2.4 159.12,12.57 160.12,13.57 160.12,19.95 161.75,21.57 v164.5,21.57 165.12,20.95 J3.4 | U4.7 142.5,58.82 143.12,58.82 v143.12,42.95 140,39.82 96.75,39.82 v96.75,47.45 | v24.62,58.7 18.38,64.94 18.38,65.32 18,65.69 U2.20 | v90.25,51.2 90.25,49.7 U3.16
  Bottom 0.15: v164.5,21.57 v143.12,42.95 | v24.62,58.7 82.75,58.7 v90.25,51.2 94,47.45 v96.75,47.45
SDA  (via drill 0.3)
  Top 0.15: SENSOR2.3 158.25,12.57 158.5,12.82 158.5,18.82 161.75,22.07 166.12,22.07 166.12,20.57 165.5,19.95 165.25,19.95 J3.3 165.12,19.82 160.5,19.82 160.5,6.2 159.75,5.45 158,5.45 | 143.25,59.32 144.12,59.32 144.12,16.57 155.25,5.45 158,5.45 | 143.25,59.32 142.5,59.32 U4.8 | 158,5.45 158,5.95 R1_PINH.1 | U2.19 19.25,65.69 19.75,65.19 19.75,64.82 21.12,63.45 35.12,63.45 35.12,65.82 35.5,66.19 80.5,66.19 v80.5,65.69 80.5,64.07 84.62,59.95 84.62,54.45 89,50.07 89,49.7 U3.15 | v143.25,59.57 143.25,59.32
  Bottom 0.15: v143.25,59.57 143.25,60.45 138,65.69 v80.5,65.69
SRC  (via drill 0.3)
  Top 0.15: Q3.3 67.38,15.32 67.62,15.57 67.62,24.7 68.88,25.95 70.5,25.95 C4.2 70.62,26.07 78.25,33.7 80.12,33.7 L1.1 80.25,33.7 v82.5,31.45 | v90.88,27.95 93.25,27.95 D5.2
  Bottom 0.15: v90.88,27.95 86,27.95 v82.5,31.45
SS_SD  (via drill 0.3)
  Top 0.15: 45,36.57 44.88,36.45 R10.1 45,36.57 | 45,36.57 45,38.32 D11.1 | 9.25,45.07 8.75,44.57 8.75,43.7 18.88,33.57 46.5,33.57 46.5,35.07 45,36.57 | 9.25,45.07 11,46.82 11,47.7 11.5,48.2 U2.4 | v6.38,74.94 6.38,87.57 5.5,88.44 J4.P2 | v6.38,66.57 7,65.94 7,47.32 9.25,45.07
  Bottom 0.15: v6.38,66.57 v6.38,74.94
TX
  Top 0.15: U2.25 11.62,65.82 12.12,66.32 12.12,69.07 12.25,69.19 TX.TP
USB_D+  (via drill 0.3)
  Top 0.15: v151.5,50.7 152.12,51.32 153.75,51.32 D1.1 | v89.75,45.2 v95.5,45.2 | v34.88,51.7 24.25,51.7 24.25,48.32 U2.14
  Bottom 0.15: v151.5,50.7 128.38,50.7 122.88,45.2 v95.5,45.2 | v89.75,45.2 45,45.2 38.5,51.7 v34.88,51.7
USB_D-  (via drill 0.3)
  Top 0.15: v144.62,49.45 153.75,49.45 D1.3 | v95,44.7 85.25,44.7 85.25,44.82 v81.88,48.2 | v34.38,52.2 23,52.2 23,48.32 U2.13
  Bottom 0.15: v144.62,49.45 127.62,49.45 122.88,44.7 v95,44.7 | v81.88,48.2 42.5,48.2 38.5,52.2 v34.38,52.2
VBAT  (via drill 0.3)
  Top 0.3: U4.3 140.5,58.45 140.5,58.82 U4.2 140.38,58.95 139.75,58.95 | 139.75,58.95 139.75,59.57 144.62,64.44 149.12,64.44 VBAT.TP | v77.38,28.32 77.38,26.95 76,25.57 Q1.3 | v130.12,56.7 130.5,57.07 131,57.07 MCP73831.3 131.12,57.32 131.12,58.57 133.5,58.57 C2_BAT.1 | v138.25,58.95 139.75,58.95
  Bottom 0.3: v77.38,28.32 79.75,30.7 79.75,30.82 95.25,46.32 119.25,46.32 119.38,46.2 119.62,46.2 v130.12,56.7 134.25,56.7 136.5,58.95 v138.25,58.95
VBUS  (via drill 0.3)
  Top 0.3: 155.25,50.32 156.25,50.32 D1.5 | 155.25,50.32 155.25,48.82 156.12,47.95 C4_USB.1 156.25,47.82 156.25,46.82 C5_USB.1 156.25,46.7 156.25,44.2 PFMF.050.1.2 | 155.25,50.32 155.25,54.95 149.12,61.07 VBUS.TP 149,61.07 v142,61.07 | CHG_LED.A 125.62,57.07 125.62,55.2 C1_BAT.1 | MCP73831.4 128.38,57.2 125.75,57.2 CHG_LED.A | v74.88,26.57 74,26.57 Q1.1 | 119.75,46.82 120.38,46.82 R1_PWRUSB.2 120.38,46.95 120.38,47.32 122.25,47.32 D2.2 | 119.75,46.82 v119.5,46.82 | 119.75,46.82 119.75,58.2 124.5,58.2 125.5,57.2 CHG_LED.A
  Bottom 0.3: v74.88,26.57 95.12,46.82 v119.5,46.82 119.5,46.95 129.88,57.32 134.25,57.32 138,61.07 v142,61.07
VRTC
  Top 0.15: C10_SUPERCAP.2 96.25,49.32 94,49.32 R_CAPACITOR.2 93.88,49.2 90.75,46.07 88.62,46.07 88.62,45.95 C8.1 88.5,45.95 87.88,46.57 87.88,49.57 U3.14
VUSB  (via drill 0.3)
  Top 0.3: J2.A9 164.12,56.82 164.12,56.57 J2.B4 164.25,56.57 164.75,56.57 165.38,55.95 165.38,52.57 164.75,51.95 164.25,51.95 J2.B9 164.12,51.95 164.12,51.82 J2.A4 164,51.7 v163,51.7 | v154.5,43.2 151.88,43.2 151.88,44.07 PFMF.050.1.1
  Bottom 0.3: v154.5,43.2 v163,51.7